# Altium PCB PCB.PcbDoc
Units mm, origin at the board's own origin, x right, y up, seen from the top; angles counter-clockwise.
Board outline 92.95 x 50 mm, 2 copper layers (Top Layer, Bottom Layer); 42 components, 29 nets, 113 pads, 26 vias.
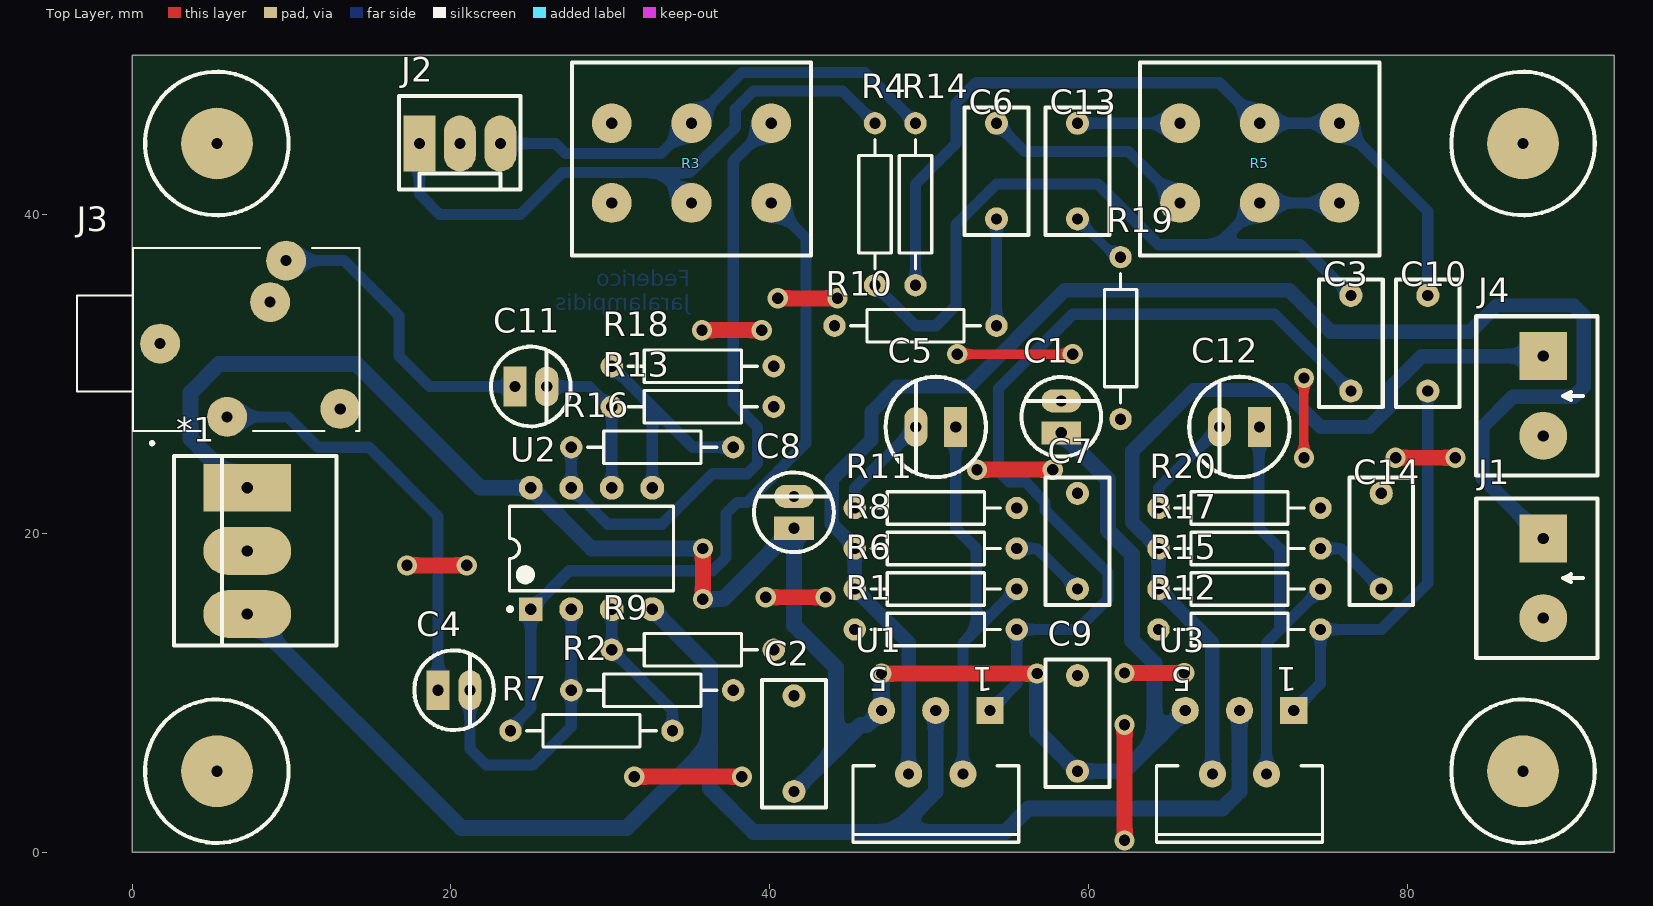
[diagram p0: Top Layer view]
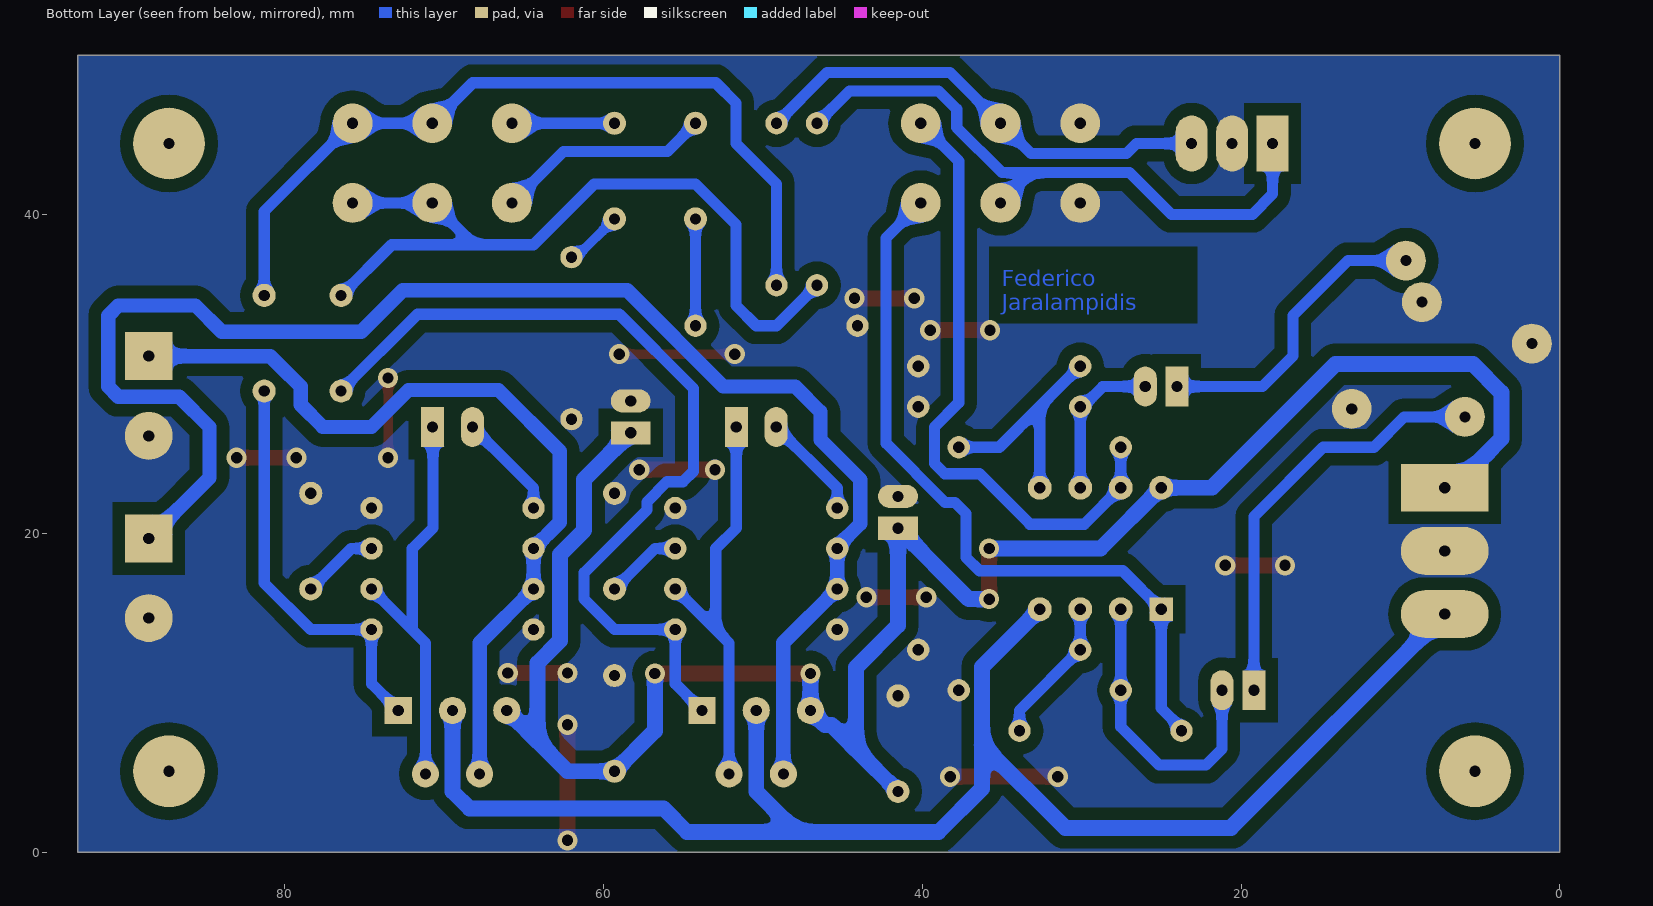
[diagram p1: Bottom Layer view, seen from below]

## Layer stack, top to bottom
Top Solder: solder mask 0.0102, Solder Resist, Dk 3.5
Top Layer: signal copper 0.0356
Dielectric 1: dielectric 0.32, FR-4, Dk 4.8
Bottom Layer: signal copper 0.0356
Bottom Solder: solder mask 0.0102, Solder Resist, Dk 3.5

## Board outline
0,0 92.954,0 92.954,50 0,50

## Design rules (kind name [scope] priority, off if disabled: settings)
Clearance Polygon [InPolygon] p1: gap=0.8 ignorepadtopadclearanceinfootprint=TRUE
Clearance [All] p2: gap=0.254 ignorepadtopadclearanceinfootprint=FALSE except(0: Arc-Hole Track-Hole SMDPad-Hole THPad-Hole Via-Hole Fill-Hole Poly-Hole Region-Hole Text-Hole)
PolygonConnect [All] p1: connectstyle=Direct reliefconductorwidth=0.254 reliefentries=4 polygonreliefangle="90 Angle" airgapwidth=0.254
RoutingVias [All] p1: holewidth=0.711 width=1.27 viastyle="Through Hole" minholewidth=0.711 minwidth=1.27 maxholewidth=0.711 maxwidth=1.27
SolderMaskExpansion [All] p1: expansion=0.102 istentingtop=FALSE
Width [All] p1: maxlimit=1 minlimit=0.6 preferedwidth=0.8
30 further rules are at their usual default settings.

## Components (designator, comment, footprint, x,y, rotation, side; value= is the part's Value field where it differs from the comment)
*1 "Molex KK396 3P" "Molex kk396 3P" 7.229,18.909 r90 top
C1 "100uF 25V" "100uF 25V" 58.283,27.314 r90 top value=100pF
C2 "100nF" 104 41.519,9.819 r270 top value=100pF
C3 "100nF" 104 76.444,28.934 r90 top value=100pF
C4 "4.7uF 50V" "4.7uF 50V" 20.199,10.169 r0 top value=100pF
C5 "22uF 63V" "22uF 63V" 50.409,26.679 r180 top value=100pF
C6 "22nF" 104 54.219,39.729 r90 top value=100pF
C7 "100nF" 104 59.299,16.519 r90 top value=100pF
C8 "100uF 25V" "100uF 25V" 41.519,21.329 r90 top value=100pF
C9 "100nF" 104 59.299,5.089 r90 top value=100pF
C10 "100nF" 104 81.27,28.934 r90 top value=100pF
C11 "4.7uF 50V" "4.7uF 50V" 25.009,29.219 r0 top value=100pF
C12 "22uF 63V" "22uF 63V" 69.459,26.679 r180 top value=100pF
C13 "22nF" 104 59.299,39.729 r90 top value=100pF
C14 "100nF" 104 78.349,16.519 r90 top value=100pF
J1 "TERMINAL 2P" "TERMINAL 2P" 88.509,19.694 r90 top
J2 "Molex 3" "Molex kk100 3P" 20.564,44.459 r180 top
J3 "PJ324M" WENZHOU_PJ324M 7.159,31.914 r90 top
J4 "TERMINAL 2P" "TERMINAL 2P" 88.509,31.124 r90 top
R1 "22K" AXIAL-0.4 50.409,13.979 r0 top value=1K
R2 "10K" AXIAL-0.4 32.629,10.169 r0 top value=1K
R3 "Pot stereo" "Pote doble" 35.089,43.229 r180 top value=50K
R4 "100K" AXIAL-0.4 46.599,40.649 r90 top value=1K
R5 "Pot stereo" "Pote doble" 70.729,43.229 r180 top value=50K
R6 "22K" AXIAL-0.4 50.409,16.519 r0 top value=1K
R7 "100K" AXIAL-0.4 28.819,7.629 r0 top value=1K
R8 "1" AXIAL-0.4 50.409,19.059 r0 top value=1K
R9 "47K" AXIAL-0.4 35.169,12.709 r0 top value=1K
R10 "1K" AXIAL-0.4 49.139,33.029 r180 top
R11 "680" AXIAL-0.4 50.409,21.599 r180 top value=1K
R12 "22K" AXIAL-0.4 69.459,13.979 r0 top value=1K
R13 "10K" AXIAL-0.4 35.169,27.949 r0 top value=1K
R14 "100K" AXIAL-0.4 49.139,40.649 r90 top value=1K
R15 "22K" AXIAL-0.4 69.459,16.519 r0 top value=1K
R16 "100K" AXIAL-0.4 32.629,25.409 r0 top value=1K
R17 "1" AXIAL-0.4 69.459,19.059 r0 top value=1K
R18 "47K" AXIAL-0.4 35.169,30.489 r0 top value=1K
R19 "1K" "AXIAL-0.4 MIA" 62,32.25 r270 top
R20 "680" AXIAL-0.4 69.459,21.599 r180 top value=1K
U1 "TDA2030" TDA2030 50.409,6.909 r180 top
U2 "NE5532AJG" DIP-8 28.819,19.059 r90 top
U3 "TDA2030" TDA2030 69.459,6.909 r180 top

## Footprints (in the part's own frame and the unit in brackets; to place one, negate y for a bottom-side part, rotate by r counter-clockwise, add the part's x,y. Pads: shape width x height; smd on the part's side, far side on the other; paste and mask are expansions set on the pad)
"4.7uF 50V" [mm]
  rect 1.45x2.5 hole 0.7: 1(-1,0)
  oval 1.45x2.5 hole 0.7: 2(1,0)
  silkscreen extent -2.5,-2.5 2.5,2.5, body extent -2.5,-2.5 2.5,2.5, height 1.27
"22uF 63V" [mm]
  rect 1.45x2.5 hole 0.7: 1(-1.25,0)
  oval 1.45x2.5 hole 0.7: 2(1.25,0)
  silkscreen extent -3.15,-3.15 3.15,3.15, body extent -3.15,-3.15 3.15,3.15, height 1.27
"100uF 25V" [mm]
  rect 1.45x2.5 hole 0.7: 1(-1,0)
  oval 1.45x2.5 hole 0.7: 2(1,0)
  silkscreen extent -2.5,-2.5 2.5,2.5, body extent -2.5,-2.5 2.5,2.5, height 1.27
104 [mm]
  round 1.45 hole 0.7: 1(0,0) 2(6,0)
  silkscreen extent -1,-2 7,2
AXIAL-0.4 [mm] "Axial Device, Thru-Hole; 2 Leads; 0.4 in Pin Spacing"
  round 1.4 hole 0.7: 1(-5.08,0) 2(5.08,0)
  silkscreen extent -4.06,-1.02 4.06,1.02
"AXIAL-0.4 MIA" [mm] "Axial Device, Thru-Hole; 2 Leads; 0.4 in Pin Spacing"
  round 1.4 hole 0.7: 1(-5.08,0) 2(5.08,0)
  silkscreen extent -4.06,-1.02 4.06,1.02, body extent -5.33,-1.15 5.33,1.14, height 2.63
DIP-8 [mm] "DIP; 8 Leads; Row Spacing 7.62 mm; Pitch 2.54 mm"
  rect 1.5x1.5 hole 0.7: 1(-3.81,3.81)
  round 1.5 hole 0.7: 2(-3.81,1.27) 3(-3.81,-1.27) 4(-3.81,-3.81) 5(3.81,-3.81) 6(3.81,-1.27) 7(3.81,1.27) 8(3.81,3.81)
  silkscreen extent -3.93,-5.15 2.65,5.23, body extent -3.6,-5.15 3.6,5.15, height 5.08
"Molex kk100 3P" [mm]
  rect 2x3.5 hole 0.7: 1(2.54,0)
  oval 2x3.5 hole 0.7: 2(0,0) 3(-2.54,0)
  silkscreen extent -3.81,-2.98 3.81,2.88
"Molex kk396 3P" [mm]
  rect 3x5.5 hole 0.7: 1(3.96,0)
  oval 3x5.5 hole 0.7: 2(0,0) 3(-3.96,0)
  silkscreen extent -5.94,-5.6 5.94,4.6
"Pote doble" [mm]
  round 2.5 hole 0.7: 1(5,2.5) 2(0,2.5) 3(-5,2.5) 4(5,-2.5) 5(0,-2.5) 6(-5,-2.5)
  silkscreen extent -7.5,-6.3 7.5,5.8, body extent -8.9,-21.25 8.2,5.85, height 3.5
TDA2030 [mm]
  rect 1.7x1.7 hole 0.7: 1(-3.4,-1.99)
  round 1.7 hole 0.7: 2(-1.7,1.99) 3(0,-1.99) 4(1.7,1.99) 5(3.4,-1.99)
  silkscreen extent -5.2,1.48 5.2,6.28
"TERMINAL 2P" [mm]
  rect 3x3 hole 0.7: 1(0,0)
  round 3 hole 0.7: 2(-5,0)
  silkscreen extent -7.5,-3.4 2.5,4.2
WENZHOU_PJ324M [mm]
  round 2.5 hole 0.7: 1(0,5.4) 2(5.2,-2.5) 3(2.6,-1.5) 4(-4.1,-5.9) 5(-4.6,1.2)
  silkscreen extent -6.35,-7.1 6,10.6, body extent -5.75,-7.1 5.75,10.6, height 6.3

## Part data
C1 C4 C5 C8 C11 C12: "Polarized Capacitor (Radial)", LatestRevisionDate=17-Jul-2002, LatestRevisionNote="Re-released for DXP Platform.", PackageDescription="Polarized Capacitor (Radial); 2 Leads", PackageReference=RB7.6-15, Published=8-Jun-2000, Publisher="Altium Limited"
C2 C3 C7 C9 C10 C14: library part 104, "Capacitor", LatestRevisionDate=17-Jul-2002, LatestRevisionNote="Re-released for DXP Platform.", PackageDescription="Radial Cap, Thru-Hole; 2 Leads; 0.3 in Pin Spacing", PackageReference=RAD-0.3, Published=8-Jun-2000, Publisher="Altium Limited"
C6 C13: library part 223, "Capacitor", LatestRevisionDate=17-Jul-2002, LatestRevisionNote="Re-released for DXP Platform.", PackageDescription="Radial Cap, Thru-Hole; 2 Leads; 0.3 in Pin Spacing", PackageReference=RAD-0.3, Published=8-Jun-2000, Publisher="Altium Limited"
J1 J4: "Header, 2-Pin", LatestRevisionDate=17-Jul-2002, LatestRevisionNote="Re-released for DXP Platform.", Publisher="Altium Limited"
J2: library part "Molex kk100 3P", "Header, 3-Pin", LatestRevisionDate=17-Jul-2002, LatestRevisionNote="Re-released for DXP Platform.", Publisher="Altium Limited"
J3: "Headphone Stereo jack/Audio connector", Package=Package, Check_prices=https://www.snapeda.com/parts/PJ324M/Wenzhou+QingPu+Electronics+Co.Ltd/view-part/?ref=eda, MF="Wenzhou QingPu Electronics Co.Ltd", MP=PJ324M, SnapEDA_Link=https://www.snapeda.com/parts/PJ324M/Wenzhou+QingPu+Electronics+Co.Ltd/view-part/?ref=snap
R1 R2 R4 R6 R7 R8 R9 R10 R11 R12 R13 R14 R15 R16 R17 R18 R19 R20: library part Res1, "Resistor", LatestRevisionDate=17-Jul-2002, LatestRevisionNote="Re-released for DXP Platform.", PackageDescription="Axial Device, Thru-Hole; 2 Leads; 0.3 in Pin Spacing", PackageReference=AXIAL-0.3, Published=8-Jun-2000, Publisher="Altium Limited"
R3 R5: library part RPot, "Potentiometer", LatestRevisionDate=17-Jul-2002, LatestRevisionNote="Re-released for DXP Platform.", PackageDescription="Variable Resistor, Thru-Hole; 3 Leads", PackageReference=VR5, Published=8-Jun-2000, Publisher="Altium Limited", Set Position=0.5, Sim Note="Enter the Resistance value and the set point into parameter fields."
U2: "Dual Low-Noise Operational Amplifier", ComponentLink1Description="Manufacturer Link", ComponentLink1URL=http://www.ti.com/, ComponentLink2Description=Datasheet, ComponentLink2URL=http://www-s.ti.com/sc/ds/ne5532a.pdf, DatasheetVersion=May-1988, LatestRevisionDate=04-Mar-2005, LatestRevisionNote="Stylized 3D Model Added.", PackageDescription="DIP; 8 Leads; Row Spacing 7.62 mm; Pitch 2.54 mm", PackageReference=JG008, PackageVersion=Jan-1995, Published=15-Apr-2002, Publisher="Altium Limited"

## Free pads (board coordinates)
  round 4.5 hole 0.7: 1(5.324,5.089) 1(5.324,44.459) 1(87.239,5.089) 1(87.239,44.459)

## Via types
v1: diameter 1.27, hole 0.711, Top Layer to Bottom Layer, 26 vias

## Nets (pads, with @x,y where several pads share a name; then routed paths per layer and width w, separated by ;. In a path a pad name is that pad's centre, name@x,y a point inside that pad or via, vN(x,y) a via of type N, cw(c..) or ccw(c..) an arc to the next point about the centre after c; other vN are vias at no path point)
+12: *1.1 C1.1 C2.2 C8.1 C9.1 U1.5 U2.8 U3.5 | length 128.2
  Top Layer w1: v1(35.804,15.884) v1(35.804,19.059) ; v1(47.009,11.214) v1(56.764,11.214)
  Bottom Layer w1: *1.1@7.229,22.384 3.673,25.94 3.673,28.838 5.451,30.616 14.087,30.616 21.834,22.869 U2.8 28.819,19.059 v1(35.804,19.059) ; v1(35.804,15.884) 37.074,15.884 C8.1 41.519,14.233 44.147,11.606 44.147,6.447 ; C2.2 44.147,6.447 ; v1(47.009,11.214) U1.5 46.11,8 45.7,8 44.147,6.447 ; v1(56.764,11.214) 56.764,7.625 C9.1 62.249,5.089 64.125,6.965 ; C1.1 61.204,23.393 61.204,20.202 62.728,18.678 62.728,13.272 64.125,11.875 64.125,6.965 ; U3.5 64.125,6.965
-12: *1.3 U1.3 U2.4 U3.3 | length 98.6
  Bottom Layer w1: *1.3 20.645,1.533 31.027,1.533 36.255,6.761 ; U2.4 36.255,11.623 36.255,6.761 ; U1.3 50.409,3.819 47.869,1.279 ; U3.3 69.459,3.819 68.39,2.75 56.221,2.75 54.75,1.279 47.869,1.279 ; 36.255,6.761 36.255,4.003 38.979,1.279 47.869,1.279
GND: *1.2 C1.2 C2.1 C7.2 C8.2 C9.2 C14.2 J1.2 J2.2 J3.1 J3.3 J3.4 J4.2 R1.1 R2.2 R3.1 R3.4 R9.2 R10.2 R11.1 R12.1 R13.2 R18.2 R19.2 R20.1 | length 53.5
  Top Layer w0.6: v1(51.75,31.25) v1(59,31.25) ; v1(73.5,24.75) v1(73.5,29.75)
  Top Layer w1: v1(17.25,18) v1(21,18) ; v1(31.5,4.75) v1(38.25,4.75) ; v1(35.75,32.75) v1(39.5,32.75) ; v1(39.75,16) v1(43.5,16) ; v1(40.5,34.75) v1(44.25,34.75) ; v1(53,24) v1(57.75,24) ; v1(62.25,0.75) v1(62.25,8) ; v1(62.25,11.25) v1(66,11.25) ; v1(79.25,24.75) v1(83,24.75)
NetC3_1: C3.1 R1.2 U1.1 | length 55
  Bottom Layer w0.7: U1.1 55.489,10.579 R1.2 59.299,13.979 61.204,15.884 61.204,17.535 57.267,21.472 57.267,21.983 56,23.25 55,23.25 54.346,23.904 54.346,29.096 59,33.75 71.66,33.75 76.444,28.965 C3.1
NetC3_2: C3.2 R4.1 R5.2 R5.3 | length 49.2
  Bottom Layer w0.7: R4.1 49.139,33.029 50.409,33.029 51.679,34.299 51.679,39.379 54.219,41.919 60.569,41.919 64.379,38.109 68.109,38.109 ; R5.3 R5.2 68.109,38.109 ; C3.2 73.269,38.109 68.109,38.109
NetC4_1: C4.1 J3.5 | length 26.7
  Bottom Layer w0.7: J3.5 9.769,27.314 11.674,25.409 14.849,25.409 19.199,21.059 C4.1
NetC4_2: C4.2 R2.1 U2.2 | length 18.8
  Bottom Layer w0.7: C4.2 21.199,6.486 22.215,5.47 25.136,5.47 27.549,7.883 R2.1 U2.2
NetC5_1: C5.1 R6.2 U1.2 | length 26.2
  Bottom Layer w0.7: C5.1 51.659,20.349 52.949,19.059 52.949,13.979 ; U1.2 52.109,13.139 52.949,13.979 ; R6.2 52.949,13.979
NetC5_2: C5.2 R11.2 | length 6.7
  Bottom Layer w0.7: R11.2 45.329,22.849 C5.2
NetC6_1: C6.1 R10.1 | length 6.7
  Bottom Layer w0.7: R10.1 C6.1
NetC6_2: C6.2 R5.1 | length 13.6
  Bottom Layer w0.7: C6.2 55.984,43.965 62.494,43.965 R5.1
NetC7_1: C7.1 R8.2 | length 4.9
  Bottom Layer w0.7: R8.2 56.759,19.059 C7.1
NetC10_1: C10.1 R12.2 U3.1 | length 25.8
  Bottom Layer w0.7: U3.1 74.539,10.579 R12.2 78.349,13.979 81.27,16.9 81.27,27.949 C10.1
NetC10_2: C10.2 R5.5 R5.6 R14.1 | length 51.2
  Bottom Layer w0.7: R14.1 49.139,41.919 51.679,44.459 51.679,46.999 52.949,48.269 68.189,48.269 R5.5 R5.6 81.27,40.188 C10.2
NetC11_1: C11.1 J3.2 | length 19.1
  Bottom Layer w0.7: J3.2 13.304,37.114 16.754,33.664 16.754,31.124 18.659,29.219 C11.1
NetC11_2: C11.2 R13.1 U2.6 | length 9.7
  Bottom Layer w0.7: C11.2 28.672,29.219 29.942,27.949 R13.1 U2.6
NetC12_1: C12.1 R15.2 U3.2 | length 26.2
  Bottom Layer w0.7: C12.1@70.689,26.679 70.689,20.349 71.979,19.059 71.979,13.979 ; U3.2 71.159,13.139 71.989,13.969 R15.2
NetC12_2: C12.2 R20.2 | length 6.7
  Bottom Layer w0.7: R20.2 64.379,22.849 C12.2
NetC13_1: C13.1 R19.1 | length 3.7
  Bottom Layer w0.6: C13.1 61.699,37.33 R19.1
NetC13_2: C13.2 R5.4 | length 6.4
  Bottom Layer w0.7: C13.2 R5.4
NetC14_1: C14.1 R17.2 | length 4.9
  Bottom Layer w0.7: R17.2 75.809,19.059 C14.1
NetJ1_1: J1.1 R6.1 R8.1 U1.4 | length 96
  Bottom Layer w0.9: U1.4 48.709,13.139 R6.1 R8.1 45.329,19.168 43.875,20.622 43.875,23.375 46.375,25.875 46.375,27.625 47.969,29.219 52.469,29.219 58.5,35.25 72.573,35.25 75.174,32.648 83.933,32.648 85.584,34.299 90.414,34.299 91.049,33.664 91.049,29.219 90.414,28.584 86.604,28.584 84.699,26.679 84.699,23.504 J1.1
NetJ2_1: J2.1 R3.2 R4.2 | length 39.7
  Bottom Layer w0.7: J2.1 18.024,41.284 19.294,40.014 24.374,40.014 26.993,42.633 33.185,42.633 ; R3.2 33.185,42.633 ; R4.2 44.567,47.761 38.979,47.761 37.836,46.618 37.836,45.475 34.994,42.633 33.185,42.633
NetJ2_3: J2.3 R3.5 R14.2 | length 29.7
  Bottom Layer w0.7: J2.3 26.557,44.459 27.191,43.825 33.185,43.825 R3.5 38.264,48.904 45.964,48.904 R14.2
NetJ4_1: J4.1 R15.1 R17.1 U3.4 | length 53.2
  Bottom Layer w0.9: U3.4 67.759,13.139 R15.1 R17.1 62.728,20.71 62.728,25.155 66.573,29 72.219,29 74.539,26.679 77.587,26.679 78.984,28.076 78.984,29.219 80.254,30.489 80.889,31.124 J4.1
NetR3_3: R3.3 R7.1 U2.1 | length 47.3
  Bottom Layer w0.7: R7.1 23.739,7.776 25.009,9.046 U2.1 27.422,17.662 36.412,17.662 37.25,18.5 37.25,21.25 37.941,21.941 38.559,21.941 42.281,25.663 42.281,38.537 R3.3
NetR3_6: R3.6 R16.1 U2.7 | length 39.7
  Bottom Layer w0.7: R16.1 U2.7 29.835,20.583 33.25,20.583 36.417,23.75 38.59,23.75 39.233,24.393 39.233,26.679 37.709,28.203 37.709,43.349 R3.6
NetR7_2: R7.2 R9.1 U2.3 | length 9.2
  Bottom Layer w0.7: U2.3 R9.1 33.899,8.899 R7.2
NetR16_2: R16.2 R18.1 U2.5 | length 14.8
  Bottom Layer w0.7: R18.1 32.629,27.949 ; U2.5 32.629,27.949 ; R16.2 35.169,25.409 32.629,27.949

## Polygon pours and split planes (outlines as drawn)
GND on Bottom Layer "GND_L02_P000" (solid, remove dead copper, pour order 0): 93,0 93,50 0,50 0,0

## Other copper
Bottom Layer:
  pour cut-out: 53.25,33.75 52.814,34.186 52.814,38.854 52.902,38.854 52.931,38.883 53.084,38.73 53.084,38.708
  text "Federico / Jaralampidis" at 35,34 h1

## Silkscreen, mask and mechanical layers (free items; w line width, h text height)
Top Overlay:
  circle w0.254: c87.239,44.459 r4.5
  circle w0.254: c87.239,5.089 r4.5
  circle w0.254: c5.324,5.089 r4.5
  circle w0.254: c5.324,44.459 r4.5

## Text inside footprints (layer, text, board x,y; h text height)
U1: Top Overlay "1" at 54.029,11.624 h1.5 r180; Top Overlay "5" at 47.429,11.624 h1.5 r180
U3: Top Overlay "1" at 73.079,11.624 h1.5 r180; Top Overlay "5" at 66.479,11.624 h1.5 r180